# Altium PCB PCB_V1.PcbDoc (part 2 of 2)
Units mm, origin at the board's own origin, x right, y up, seen from the top; angles counter-clockwise.
Board outline 81 x 52 mm, 4 copper layers (Top Layer, Int1 (GND), Int2 (PWR), Bottom Layer), stack 1.369 mm thick; 92 components, 65 nets, 289 pads, 303 vias.
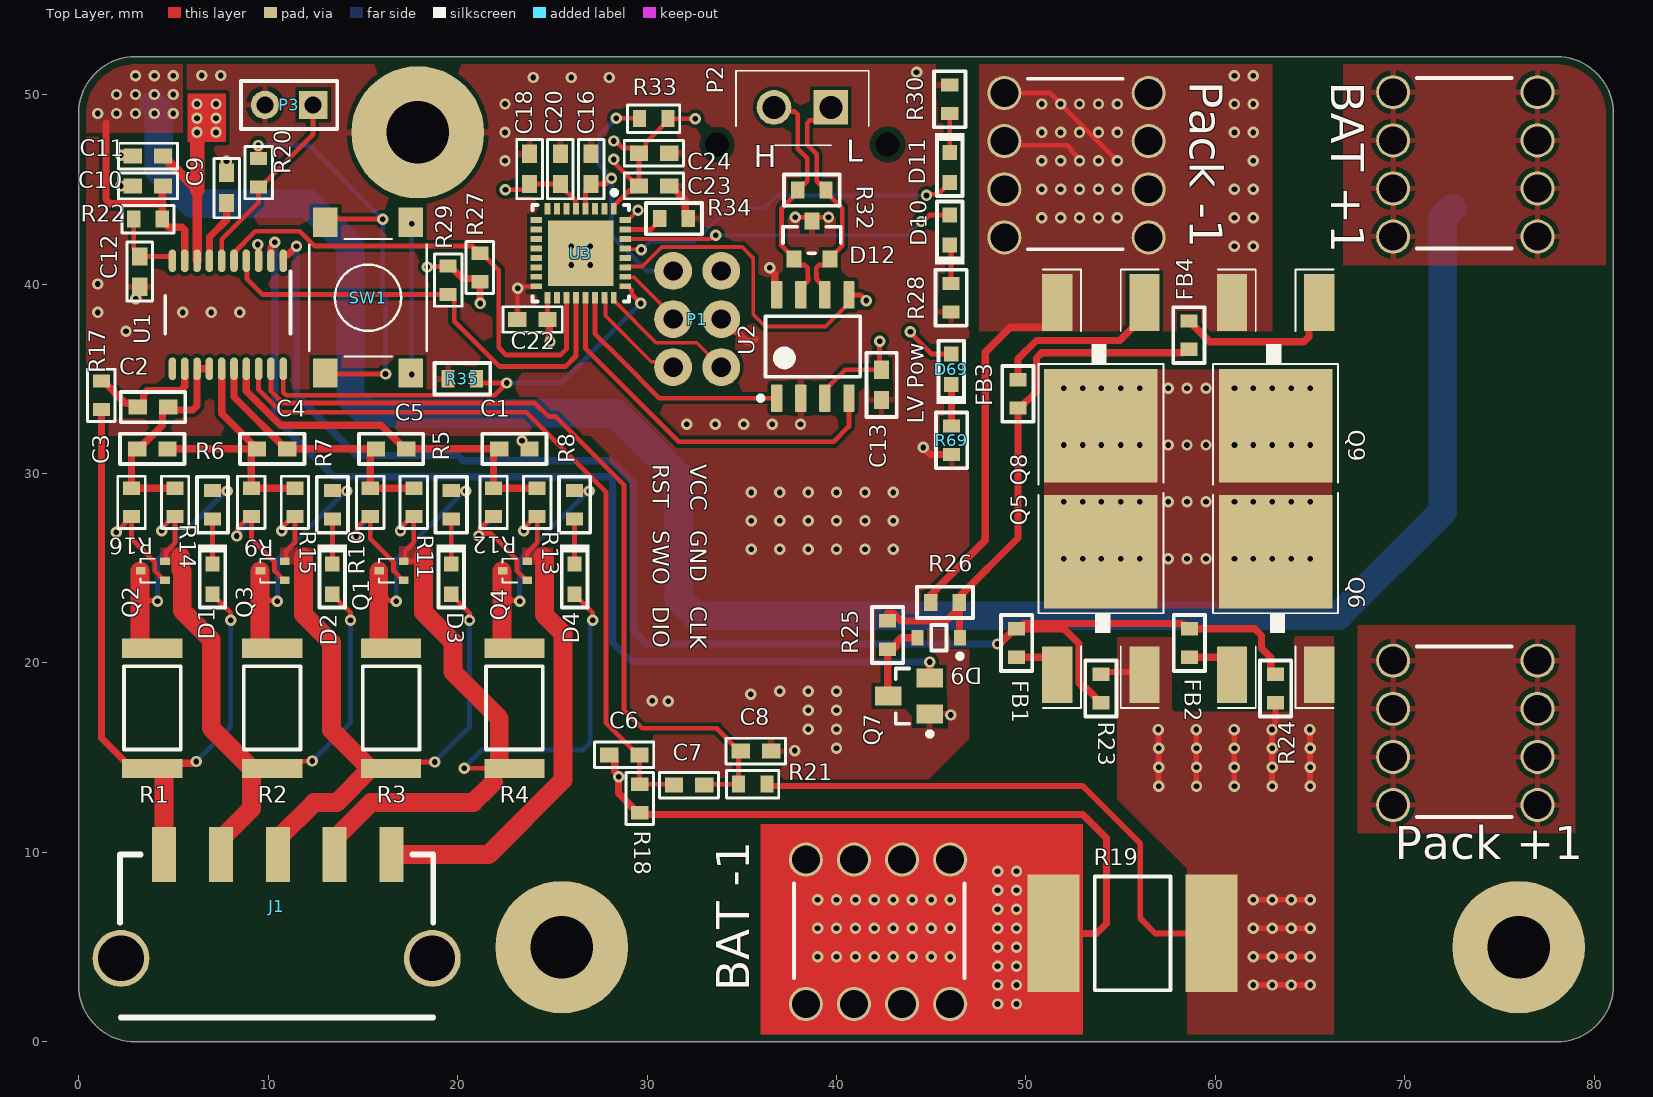
[diagram p0: Top Layer view]

## Via types
v1: diameter 0.6, hole 0.3, Top Layer to Bottom Layer, 303 vias

## Nets (pads, with @x,y where several pads share a name; then routed paths per layer and width w, separated by ;. In a path a pad name is that pad's centre, name@x,y a point inside that pad or via, vN(x,y) a via of type N, cw(c..) or ccw(c..) an arc to the next point about the centre after c; other vN are vias at no path point) (continued)
GND: (continued)
  Top Layer w0.381: v1(2.225,45.175) C10.1 ; v1(2.225,46.8) 2.25,46.775 2.825,46.775 C11.1 ; v1(3.02,39.225) 3.062,39.267 3.062,39.687 C12.1 ; v1(7.8,46.475) 7.806,46.469 7.806,45.881 C9.1 ; v1(9.455,42.085) 9.496,42.044 9.496,41.229 U1.3 ; v1(23.4,31.725) 23.442,31.683 23.442,31.576 23.717,31.3 C1.1 ; C6.2 28.082,15.15 28.292,14.94 28.292,14.267 28.5,14.059 v1(28.5,14) 28.5,13.115 29.515,12.1 R18.1 ; R18.1@29.65,12.065 29.715,12 53,12 54.25,10.75 54.25,6.25 53.725,5.725 R19.2 ; C23.1 31.257,45.175 32.015,44.417 32.015,43.61 R34.2 ; P1.5 34.05,38.15 35.242,36.958 35.558,36.958 35.7,37.1 ; v1(36.475,40.85) 36.475,40.791 36.736,40.53 36.736,39.534 U2.8 ; v1@44.53,31.42 44.95,31 R69.2 ; v1(48.5,2) v1(48.5,3) v1(48.5,4) v1(48.5,5) v1(48.5,6) v1(48.5,7) v1(48.5,8) v1(48.5,9) ; v1(49.5,2) v1(49.5,3) v1(49.5,4) v1(49.5,5) v1(49.5,6) v1(49.5,7) v1(49.5,8) v1(49.5,9)
  Int1 (GND) w0.25: v1@42.015,7.515 42.015,8.175 43.46,9.62 ; v1(43,6) 43.738,6.738 44.238,6.738 v1(45,7.5) 45.75,8.25 45.75,9.37 46,9.62
  other v1: 39,4.5 40,4.5 41,4.5 42,4.5 43,4.5 44,4.5 45,4.5 46,4.5 39,6 40,6 41,6 42,6 44,6 45,6 46,6 39,7.5 40,7.5 41,7.5 42,7.5 43,7.5 44,7.5 46,7.5 37.8,15.375 40,15.5 38.5,16.5 40,16.5 46.025,17.25 38.5,17.5 40,17.5 31.125,17.975 30.275,18 35.465,18.343 37,18.5 38.5,18.5 40,18.5 35.5,26 37,26 38.5,26 40,26 41.5,26 43,26 35.5,27.5 37,27.5 38.5,27.5 40,27.5 41.5,27.5 43,27.5 35.5,29 37,29 38.5,29 40,29 41.5,29 43,29 44.575,31.375 32.1,32.6 33.6,32.6 35.1,32.6 36.6,32.6 38.1,32.6 2.5,37.5 1,38.5 5.5,38.5 7,38.5 8.5,38.5 1,40 26,41 27,41 26,42 27,42 22.5,46.5 22.5,48 22.5,49.5 24,50.901 26,50.901 28,50.901 6.494,51.006 7.494,51.006 44.225,51.175
LED_B: D11.2 U3.29 | length 18.6
  Top Layer w0.2: U3.29 28.888,41.837 29.663,41.837 v1(29.7,41.8)
  Top Layer w0.254: v1(44.75,44.675) 44.816,44.741 45.366,44.741 45.702,45.077 45.727,45.077 45.975,45.325 D11.2
  Bottom Layer w0.2: v1(29.7,41.8) 30.15,42.25 32.515,42.25 34.265,44 36.2,44 36.875,44.675 v1(44.75,44.675)
LED_R: D10.2 U3.30 | length 17.7
  Top Layer w0.2: U3.30 33.317,42.375 33.517,42.575 v1(33.625,42.575)
  Top Layer w0.254: v1(44.475,43.3) 44.569,43.3 44.919,43.65 D10.2
  Bottom Layer w0.2: v1(33.625,42.575) 43.75,42.575 v1(44.475,43.3)
NetC1_2: C1.2 C5.1 R12.2 R13.2 U1.17 | length 20.2
  Top Layer w0.381: U1.17 8.85,34.353 10.653,32.55 15.957,32.55 17.208,31.3 C5.1 22.117,31.3 21.9,31.083 R12.2 R13.2
NetC2_1: C2.1 C3.2 R14.2 R16.2 U1.13 U1.14 | length 11.8
  Top Layer w0.381: R14.2 R16.2 2.79,31.082 3.008,31.3 C3.2 3.173,31.3 4.433,32.56 4.433,33.29 4.643,33.5 C2.1 4.875,33.35 6.027,33.35 6.25,33.573 U1.13 U1.14
NetC2_2: C2.2 R17.2 U1.12 | length 6.6
  Top Layer w0.381: R17.2 1.3,34.875 2.465,33.71 2.915,33.71 C2.2 3.207,33.5 3.417,33.71 3.417,34.167 3.623,34.373 5.373,34.373 5.596,34.596 5.596,35.521 U1.12
NetC3_1: C3.1 C4.2 R9.2 R15.2 U1.15 | length 14.2
  Top Layer w0.381: C3.1 C4.2@9.333,31.3 ; U1.15 7.55,33.165 9.123,31.592 9.123,31.509 C4.2@9.333,31.3 ; C4.2 C4.2@9.333,31.3 ; R15.2 R9.2 9.115,31.083 C4.2@9.333,31.3
NetC4_1: C4.1 C5.2 R10.2 R11.2 U1.16 | length 14.6
  Top Layer w0.381: U1.16 8.2,34.033 10.933,31.3 C4.1 C5.2@15.608,31.3 ; C5.2 C5.2@15.608,31.3 ; R11.2 R10.2 15.39,31.083 C5.2@15.608,31.3
NetC9_2: C9.2 U1.7 | length 3.4
  Top Layer w0.381: U1.7 6.9,42.477 7.812,43.39 C9.2
NetC12_2: C12.2 R22.1 U1.10 | length 4
  Top Layer w0.254: R22.1 2.913,41.845 3.225,41.533 C12.2 4.883,41.45 4.95,41.383 U1.10
NetC15_2: 
NetD1_1: D1.1 R6.1 | length 2.4
  Top Layer w0.254: D1.1 R6.1
NetD1_2: D1.2 J1.5 R1.1 R17.1 | length 37
  Top Layer w0.254: D1.2 7.065,23.6 8.025,22.64 v1(8.025,22.25)
  Top Layer w0.381: R17.1 1.2,16.035 2.81,14.425 R1.1 ; R1.1@4.515,14.39 4.836,14.711 6.052,14.711 6.141,14.8 v1(6.2,14.8)
  Top Layer w1: J1.5 R1.1@4.515,14.39
  Bottom Layer w0.254: v1(6.2,14.8) 8.025,16.625 v1(8.025,22.25)
NetD2_1: D2.1 R7.1 | length 2.4
  Top Layer w0.254: D2.1 R7.1
NetD2_2: D2.2 D5.2 J1.4 Q2.2 R2.1 R14.1 | length 35.9
  Top Layer w0.254: v1@4.456,27.191 4.99,27.725 R14.1 5.09,26.35 4.615,25.875 4.615,25.43 Q2.2 ; R2.1 10.598,14.808 12.308,14.808 v1(12.325,14.825) ; D2.2 13.39,23.6 14.35,22.64 v1(14.35,22.25)
  Top Layer w1: 5.39,25.612 5.39,24.923 5.467,24.845 5.467,22.758 7,21.225 7,16.56 R2.1@9.135,14.425 ; J1.4 7.515,10.715 9.125,12.325 9.125,14.415 R2.1@9.135,14.425 ; R2.1 R2.1@9.135,14.425
  Bottom Layer w0.254: v1(4.39,26.975) 4.456,27.041 4.456,27.239 4.993,27.775 D5.2 ; v1(12.325,14.825) 14.35,16.85 v1(14.35,22.25)
NetD3_1: D3.1 R5.1 | length 2.4
  Top Layer w0.254: D3.1 R5.1
NetD3_2: D3.2 D6.2 J1.3 Q3.2 R3.1 R15.1 | length 37.2
  Top Layer w0.254: v1@10.781,27.191 11.315,27.725 R15.1 11.415,26.35 10.94,25.875 10.94,25.43 Q3.2 ; 11.668,25.375 11.875,25.582 ; R3.1 16.84,14.775 v1(18.8,14.775) ; D3.2 19.665,23.6 20.625,22.64 v1(20.625,22.25)
  Top Layer w1: J1.3 10.515,10.715 12.432,12.632 13.618,12.632 15.393,14.407 13.35,16.45 13.35,21.075 11.875,22.55 11.875,25.582
  Bottom Layer w0.254: v1(10.715,26.975) 10.781,27.041 10.781,27.239 11.318,27.775 D6.2 ; v1(18.8,14.775) 20.625,16.6 v1(20.625,22.25)
NetD4_1: D4.1 R8.1 | length 2.4
  Top Layer w0.254: D4.1 R8.1
NetD4_2: D4.2 D7.2 J1.2 Q1.2 R4.1 R11.1 | length 46.3
  Top Layer w0.254: v1@17.056,27.191 17.59,27.725 R11.1 17.69,26.35 17.215,25.875 Q1.2@17.215,25.525 ; Q1.2 17.95,25.375 18.2,25.625 ; v1(20.358,14.442) 21.537,14.442 21.537,14.415 21.91,14.042 21.91,13.71 ; D4.2 26.175,23.6 27.135,22.64 v1(27.135,22.25)
  Top Layer w1: J1.2 13.515,10.715 15.437,12.638 20.837,12.638 21.638,13.438 21.91,13.71 ; 18.2,25.625 18.2,22.675 19.75,21.125 19.75,19.525 22.2,17.075 R4.1@22.2,14.525
  Bottom Layer w0.254: v1(16.99,26.975) 17.056,27.041 17.056,27.239 17.593,27.775 D7.2 ; v1(20.358,14.442) 20.358,14.483 21.282,15.407 26.613,15.407 27,15.794 27,22.021 27.135,22.156 v1(27.135,22.25)
NetD5_1: D5.1 Q2.1 R16.1 | length 6.7
  Top Layer w0.254: v1(1.98,26.9) 2.43,27.35 ; 2.415,27.325 2.415,27.35 2.467,27.402 2.467,27.502 2.69,27.725 R16.1 2.79,26.55 4.019,25.321 4.019,24.861 4.505,24.375 Q2.1
  Bottom Layer w0.254: v1(1.98,26.9) 1.998,26.9 D5.1@2.898,27.8 ; D5.1@2.883,27.775 D5.1
NetD6_1: D6.1 Q3.1 R9.1 | length 7
  Top Layer w0.254: v1(8.35,26.7) 8.416,26.766 8.416,27.126 9.015,27.725 R9.1 9.115,26.55 10.344,25.321 10.344,24.861 10.83,24.375 Q3.1
  Bottom Layer w0.254: v1(8.35,26.7) 8.832,27.182 8.832,27.399 9.223,27.79 D6.1@9.223,27.8 ; D6.1@9.208,27.775 D6.1
NetD7_1: D7.1 Q1.1 R10.1 | length 7
  Top Layer w0.254: v1(14.65,26.7) 14.716,26.766 14.716,27.151 15.29,27.725 R10.1 15.39,26.55 16.619,25.321 16.619,24.861 17.105,24.375 Q1.1
  Bottom Layer w0.254: v1(14.65,26.7) 14.716,26.766 14.716,27.009 15.498,27.79 D7.1@15.498,27.8 ; D7.1@15.483,27.775 D7.1
NetD8_1: D8.1 Q4.1 R12.1 | length 6.8
  Top Layer w0.254: v1(21.125,26.7) 21.259,26.834 21.741,26.834 23.129,25.446 23.129,24.861 23.615,24.375 Q4.1 ; v1@21.165,26.834 21.191,26.86 21.191,27.116 21.8,27.725 R12.1
  Bottom Layer w0.254: v1(21.125,26.7) 21.191,26.766 21.191,26.974 D8.1@21.992,27.775 ; D8.1@21.992,27.775 D8.1 D8.1@21.992,27.775
NetD8_2: D8.2 J1.1 Q4.2 R13.1 | length 27.5
  Top Layer w0.254: v1@23.566,27.191 24.1,27.725 R13.1 24.2,26.35 23.67,25.82 Q4.2
  Top Layer w1: J1.1 21.64,9.89 25.575,13.825 25.575,21.55 24.577,22.548 24.577,25.535 24.5,25.612
  Bottom Layer w0.254: v1(23.5,26.975) 23.566,27.041 23.566,27.239 24.102,27.775 D8.2
NetD9_1: D9.1 FB3.2 FB4.2 R25.2 R26.1 | length 29.3
  Top Layer w0.381: 42.7,22.625 43,22.625 43.418,22.207 45.782,22.207 46.475,22.9 R26.1 ; D9.1 46.495,21.345 46.495,23.18 R26.1 ; FB4.2 58.5,36.55 58.325,36.375 50.825,36.375 50.55,36.1 50.55,34.325 49.675,33.45 FB3.2 49.575,26.6 46.475,23.5 R26.1
NetD9_2: D9.2 Q7.3 R25.1 | length 4.4
  Top Layer w0.381: Q7.3 42.7,18.275 R25.1 43,20.725 43.159,20.885 43.159,21.086 43.398,21.325 D9.2
NetD10_1: D10.1 R28.1 | length 2.2
  Top Layer w0.254: D10.1 45.975,42.025 46.05,42.1 R28.1
NetD11_1: D11.1 R30.1 | length 2.1
  Top Layer w0.254: D11.1 R30.1
NetD69_1: D69.1 R69.1 | length 2.2
  Top Layer w0.381: D69.1 46.063,34.688 46.063,32.512 R69.1
NetFB1_1: FB1.1 Q5.1 | length 2.7
  Top Layer w0.381: FB1.1 51.04,20.3 51.65,19.69 Q5.1
NetFB2_1: FB2.1 Q6.1 | length 2.8
  Top Layer w0.381: FB2.1 60.265,20.3 60.875,19.69 Q6.1
NetFB3_1: FB3.1 Q8.1 | length 9.5
  Top Layer w0.381: FB3.1@49.475,34.95 FB3.1 49.575,36.05 50.55,37.025 54.95,37.025 56.25,38.325 Q8.1
NetFB4_1: FB4.1 Q9.1 | length 9
  Top Layer w0.381: FB4.1 58.7,38.05 58.86,37.89 58.86,37.79 59.7,36.95 64.677,36.95 64.94,37.213 64.94,38.39 Q9.1@65.575,39.025
NetQ1_3: Q1.3 R3.2 R5.2 | length 14
  Top Layer w0.254: 15.84,23.825 16.362,23.303 16.712,23.303 v1(16.765,23.25) ; R5.2 19.678,29.087 20.428,29.087 v1(20.44,29.075)
  Top Layer w1: Q1.3@15.84,24.845 15.84,23.825 15.84,20.785 15.85,20.775 R3.2
  Bottom Layer w0.254: v1(16.765,23.25) 16.765,25.463 20.377,29.075 v1(20.44,29.075)
NetQ2_3: Q2.3 R1.2 R6.2 | length 14
  Top Layer w0.254: 3.24,23.825 3.762,23.303 4.112,23.303 v1(4.165,23.25) ; R6.2 7.078,29.087 7.828,29.087 v1(7.84,29.075)
  Top Layer w1: Q2.3@3.24,24.845 3.24,23.825 3.24,20.785 3.25,20.775 R1.2
  Bottom Layer w0.254: v1(4.165,23.25) 4.165,25.463 7.777,29.075 v1(7.84,29.075)
NetQ3_3: Q3.3 R2.2 R7.2 | length 14
  Top Layer w0.254: 9.565,23.825 10.087,23.303 10.437,23.303 v1(10.49,23.25) ; R7.2 13.403,29.087 14.153,29.087 v1(14.165,29.075)
  Top Layer w1: Q3.3@9.565,24.845 9.565,23.825 9.565,20.785 9.575,20.775 R2.2
  Bottom Layer w0.254: v1(10.49,23.25) 10.49,25.463 14.102,29.075 v1(14.165,29.075)
NetQ4_3: Q4.3 R4.2 R8.2 | length 14
  Top Layer w0.254: 22.35,23.825 22.872,23.303 23.222,23.303 v1(23.275,23.25) ; R8.2 26.187,29.088 26.937,29.088 v1(26.95,29.075)
  Top Layer w1: Q4.3@22.35,24.845 22.35,23.825 22.35,20.785 22.36,20.775 R4.2
  Bottom Layer w0.254: v1(23.275,23.25) 23.275,25.463 26.887,29.075 v1(26.95,29.075)
NetQ5_2: Q5.2 Q6.2 Q8.2 Q9.2 | length 2.4
  Top Layer w0.25: v1(52,31.5) 52.925,31.5 Q8.2
  other v1: 52,25.5 53,25.5 53.967,25.502 55,25.5 56,25.5 57.5,25.5 58.5,25.5 59.5,25.5 61,25.5 62,25.5 63,25.5 64,25.5 65,25.5 52,28.5 53,28.5 53.967,28.502 55,28.5 56,28.5 57.5,28.5 58.5,28.5 59.5,28.5 61,28.5 62,28.5 63,28.5 64,28.5 65,28.5 53,31.5 53.967,31.502 55,31.5 56,31.5 57.5,31.5 58.5,31.5 59.5,31.5 61,31.5 62,31.5 63,31.5 64,31.5 65,31.5 52,34.5 53,34.5 53.967,34.502 55,34.5 56,34.5 57.5,34.5 58.5,34.5 59.5,34.5 61,34.5 62,34.5 63,34.5 64,34.5 65,34.5
NetR20_2: R20.2 SW1.1 SW1.3 | length 23.4
  Top Layer w0.25: SW1.1 13.075,35.25 v1(16.2,35.25) ; SW1.3 13.2,43.425 v1(16.05,43.425)
  Top Layer w0.381: v1(9.475,47.313) 9.487,47.3 9.487,46.637 R20.2
  Bottom Layer w0.254: v1(9.475,47.313) 12.163,47.313 v1(16.05,43.425) 16.05,39.379 16.2,39.229 v1(16.2,35.25)
NetR34_1: R34.1 U3.31 | length 2.1
  Top Layer w0.254: U3.31 30.2,42.875 30.675,43.35 R34.1
NRST: C16.2 P1.1 R33.1 U3.4 | length 14.7
  Top Layer w0.254: U3.4 26.75,44.893 27.05,45.193 C16.2 27.816,45.275 28.116,45.575 v1(28.125,45.575) ; v1(28.375,48.75) 29.575,48.75 R33.1
  Bottom Layer w0.254: v1(28.375,48.75) 27.475,47.85 27.475,46.274 28.125,45.624 28.125,42.552 29.987,40.69 P1.1
OSC_IN: U3.2
OSC_OUT: U3.3
"Pack +": "Pack +1.1"
"Pack -": "Pack -1.1" Q8.3 Q9.3 R26.2 | length 32
  Top Layer w0.25: 48.855,47.54 49.07,47.325 52.175,47.325 52.404,47.096 52.404,47.015 52.825,46.595 v1(52.825,46.5) ; 48.855,50.08 51.274,50.08 51.825,49.529 v1(51.825,49.5) v1(54.825,46.5)
  Top Layer w0.381: R26.2@44.825,23.45 44.975,23.6 44.975,23.45 R26.2 ; R26.2@45.125,23.45 45.135,23.46 45.135,23.6 45.135,23.76 47.85,26.475 47.85,36.4 49.165,37.715 51.04,37.715 51.65,38.325 Q8.3
  other v1: 61,42 62,42 50.825,43.5 51.825,43.5 52.825,43.5 53.825,43.5 54.825,43.5 61,43.5 62,43.5 50.825,45 51.825,45 52.825,45 53.825,45 54.825,45 61,45 62,45 50.825,46.5 51.825,46.5 53.825,46.5 62,46.5 50.825,48 51.825,48 52.825,48 53.825,48 54.825,48 61,48 62,48 50.825,49.5 52.825,49.5 53.825,49.5 54.825,49.5 61,49.5 62,49.5 61,51 62,51
Rsns-: Q5.3 Q6.3 R19.1 R21.1 R23.2 R24.2 | length 60.1
  Top Layer w0.305: R21.1@36.325,13.5 53,13.5 56.025,10.475 56.025,6.525 56.825,5.725 R19.1 ; R23.2@53.688,19.525 56.1,19.525 Q5.3 ; v1(56.982,16.483) 56.991,16.474 v1@56.991,15.5 ; v1(57,13.5) 56.991,13.509 v1@56.991,15.5 ; v1(57,15.5) v1@56.991,15.5 ; v1(58.982,16.483) 58.991,16.474 58.991,13.509 v1(59,13.5) ; v1(60.982,16.483) 60.991,16.474 60.991,13.509 v1(61,13.5) ; v1(62,3) v1(63,3) v1(64,3) v1(65,3) ; v1(62,4.5) v1(63,4.5) v1(64,4.5) v1(65,4.5) ; v1(62,6) v1(63,6) v1(64,6) v1(65,6) ; v1(62,7.5) v1(63,7.5) v1(64,7.5) v1(65,7.5) ; v1(63,13.5) 62.991,13.509 62.991,16.474 v1(62.982,16.483) 62.982,16.563 63.175,16.756 R24.2 ; v1(64.982,16.483) 64.991,16.474 64.991,13.509 v1(65,13.5)
  other v1: 57,14.5 59,14.5 61,14.5 63,14.5 65,14.5 59,15.5 61,15.5 63,15.5 65,15.5
SCL: R27.1 U1.5 U3.19 | length 26.4
  Top Layer w0.254: U1.5 8.2,41.653 9.332,42.785 11.665,42.785 12.45,42 20.8,42 R27.1 21.275,41.625 22.175,40.725 22.175,36.65 22.575,36.25 25.425,36.25 25.75,36.575 U3.19
SDA: R29.1 U1.4 U3.20 | length 24.3
  Top Layer w0.254: U1.4 8.878,41.197 8.878,40.272 9.7,39.45 R29.1 19.6,39.45 19.823,39.227 19.823,38.027 22.2,35.65 25.7,35.65 26.25,36.2 U3.20
SRN: C7.1 C8.2 R21.2 U1.19 | length 44.4
  Top Layer w0.254: U1.19 10.154,35.521 10.154,34.345 10.78,33.719 24.081,33.719 24.8,33 25.175,33 28.775,29.4 28.775,17.525 29.75,16.55 33.698,16.55 ; C7.1 33.075,13.6 R21.2 34.825,15.225 C8.2 34.868,15.35 33.693,16.525
SRP: C6.1 C7.2 R18.2 U1.18 | length 39.7
  Top Layer w0.254: U1.18 9.5,34.424 10.693,33.232 23.618,33.232 27.825,29.025 27.825,16.843 29.518,15.15 C6.1 29.6,13.615 R18.2 31.375,13.6 C7.2
SWCLK: P1.4 U3.24 | length 7.3
  Top Layer w0.2: U3.24 28.25,39.125 30.477,36.898 32.627,36.898 P1.4
SWDIO: P1.3 U3.23 | length 5.7
  Top Layer w0.2: U3.23 27.8,39.225 27.8,38.325 30.226,35.899 31.086,35.899 P1.3
SWO: P1.2 U3.26 | length 3.5
  Top Layer w0.2: U3.26 28.873,40.352 29.323,40.352 31.375,38.3 P1.2
TS1: P3.1 R20.1 U1.6 | length 10.3
  Top Layer w0.254: U1.6 7.55,42.362 9.5,44.312 R20.1 9.6,45.125 12.375,47.9 P3.1
VC1: SW1.2 SW1.4 | length 7.9
  Bottom Layer w0.254: v1(17.575,35.225) v1(17.575,43.175)
VCC: C11.2 C13.2 C18.2 C20.2 C22.2 C23.2 C24.2 D69.2 P1.6 R27.2 R29.2 R33.2 U1.8 U2.3 U3.1 U3.5 U3.17 | length 40
  Top Layer w0.25: 7.25,48.375 7.25,48.625 v1@7.375,48.75
  Top Layer w0.254: v1(18.4,40.9) 18.425,40.925 19.475,40.925 R29.2 ; v1(22.525,44.975) 23.527,44.975 23.8,45.248 C18.2 C20.2 25.425,45.193 26.227,44.391 26.227,43.998 U3.5 ; C22.2 U3.17 ; U3.1 28.25,44.125 29.027,44.902 29.302,44.902 C23.2 ; v1(28.25,46.575) 28.316,46.509 28.316,46.351 29.493,45.175 C23.2 ; v1(28.25,47.55) 28.344,47.55 28.721,47.173 29.302,47.173 C24.2 ; v1(32.55,48.725) R33.2 31.1,48.625 29.931,47.456 29.931,47.173 29.657,46.9 C24.2 ; U2.3 39.385,34.4 40.46,35.475 C13.2 42.275,35.575 v1(42.275,36.981) ; v1(43.9,37.475) 43.9,37.425 45.025,36.3 D69.2 ; C23.2 C24.2
  Top Layer w0.381: R29.2 19.6,40.95 20.265,40.285 21.015,40.285 R27.2 21.188,40.112 21.188,38.987 v1(21.2,38.975) ; C22.2 24.833,38.042 24.833,36.992 v1(24.875,36.95)
  Top Layer w0.508: C11.2 6.25,44.95 U1.8
  Top Layer w0.762: 6.25,44.95 6.25,47.655
  other v1: 6.25,48 7.25,48 6.25,48.75 7.25,48.75 6.25,49.5 7.25,49.5
pads on no net: J1.MH P2.MH1 U1.11 U3.6 U3.7 U3.8 U3.9 U3.10 U3.11 U3.12 U3.13 U3.14 U3.15 U3.18 U3.28

## Polygon pours and split planes (outlines as drawn)
GND on Top Layer "NONET_L-01_P-001" (solid, pour order 43): 0,52 47,52 47,16 44,13 28,13 28,31 27,32 0,32
"Pack +" on Top Layer "NONET_L-01_P-001" (solid, pour order 38): 67.5,22 67.5,11 79,11 79,22
"Bat +" on Top Layer "NONET_L-01_P-001" (solid, pour order 24): 66.75,52 66.75,41 81,41 81,52
NetQ5_2 on Top Layer "NONET_L-01_P-001" (solid, pour order 21): 50.95,35.475 66.15,35.475 66.15,22.875 50.975,22.875
"Pack -" on Top Layer "NONET_L-01_P-001" (solid, pour order 23): 63,37.5 63,52 47.525,52 47.525,37.5
Rsns- on Top Layer "NONET_L-01_P-001" (solid, pour order 32): 55.45,17.1 55.45,12.175 58.5,9.125 58.5,0 66.25,0 66.25,17.1
Rsns- on Top Layer "NONET_L-01_P-001" (solid, pour order 46): 66.25,16.75 66.25,21.4 64.25,21.4 64.175,21.475 64.15,21.45 64.15,17.425 57.85,17.425 57.7,17.575 57.7,21.35 54.825,21.35 54.825,12.8 55.9,11.725 55.95,11.775 56.75,11.775
"Bat +" on Top Layer "NONET_L-01_P-001" (solid, pour order 26): -0.142,51.974 -0.142,47.974 5.5,47.974 5.5,51.974
NetD8_2 on Top Layer "NONET_L-01_P-001" (solid, pour order 15): 23.425,25.2 25.034,25.2 25.034,26.075 23.425,26.075
NetD4_2 on Top Layer "NONET_L-01_P-001" (solid, pour order 16): 16.92,25.175 18.68,25.175 18.68,26.15 16.92,26.15
NetD3_2 on Top Layer "NONET_L-01_P-001" (solid, pour order 17): 10.637,25.2 12.35,25.2 12.35,26.075 10.637,26.075
NetD2_2 on Top Layer "NONET_L-01_P-001" (solid, pour order 18): 4.325,25.2 5.4,25.2 5.4,26.075 4.325,26.075
GND on Bottom Layer "NONET_L-01_P-001" (solid, pour order 47): 0,52 47,52 47,16 43,12 35,12 35,11 33,9 28,9 28,31 0,31
"Pack +" on Bottom Layer "NONET_L-01_P-001" (solid, pour order 37): 67.5,22 67.5,11 79,11 79,22
"Bat +" on Bottom Layer "NONET_L-01_P-001" (solid, pour order 27): 66.75,52 66.75,41 81,41 81,52
NetQ5_2 on Bottom Layer "NONET_L-01_P-001" (solid, pour order 34): 50.967,35.509 66.167,35.509 66.167,22.909 50.992,22.909
"Pack -" on Bottom Layer "NONET_L-01_P-001" (solid, pour order 36): 63.052,37.498 63.052,51.998 47.577,51.998 47.577,37.498
Rsns- on Bottom Layer "NONET_L-01_P-001" (solid, pour order 45): 55.425,17.775 55.425,12.575 58.475,9.525 58.475,0.4 66.225,0.4 66.225,17.775
"Bat +" on Bottom Layer "NONET_L-01_P-001" (solid, pour order 25): 0,52 0,48 5.5,48 5.5,52
VCC on Int2 (PWR) "NONET_L-01_P-001" (solid, pour order 44): 0,52 47,52 47,16 43,12 35,12 35,11 33,9 28,9 28,31 27,32 0,32
GND on Int1 (GND) "NONET_L-01_P-001" (solid, pour order 42): 0,52 47,52 47,16 43,12 35,12 35,11 33,9 28,9 28,31 0,31

## Other copper
Top Layer:
  rectangle net VCC: 5.75,47.5 7.775,50.05
  region net GND: 36,11.5 53,11.5 53,0.408 36,0.408
Bottom Layer:
  region net GND: 36,11.5 53,11.5 53,0.408 36,0.408

## Silkscreen, mask and mechanical layers (free items; w line width, h text height)
Top Overlay:
  text "L" at 40.525,46.05 h2
  text "H" at 35.625,45.775 h2
  text "LV Pow" at 44.9,32.625 h1.5 r90
  text "RST" at 30,30.5 h1.5 r270
  text "VCC" at 32,30.5 h1.5 r270
  text "SWO" at 30,27 h1.5 r270
  text "GND" at 32,27 h1.5 r270
  text "DIO" at 30,23 h1.5 r270
  text "CLK" at 32,23 h1.5 r270
Bottom Overlay:
  drawing of 57 lines, arcs and shapes, not listed
  text "LV BMS V1.0 / William Jupp" at 16,3 h2
Board outline:
  the board outline again, w0.2